# Altium PCB PR406V1.PcbDoc
Units mil, origin at the board's own origin, x right, y up, seen from the top; angles counter-clockwise.
Board outline 4540 x 3630 mil, 2 copper layers (Top Layer, Bottom Layer); 143 components, 108 nets, 406 pads, 189 vias.
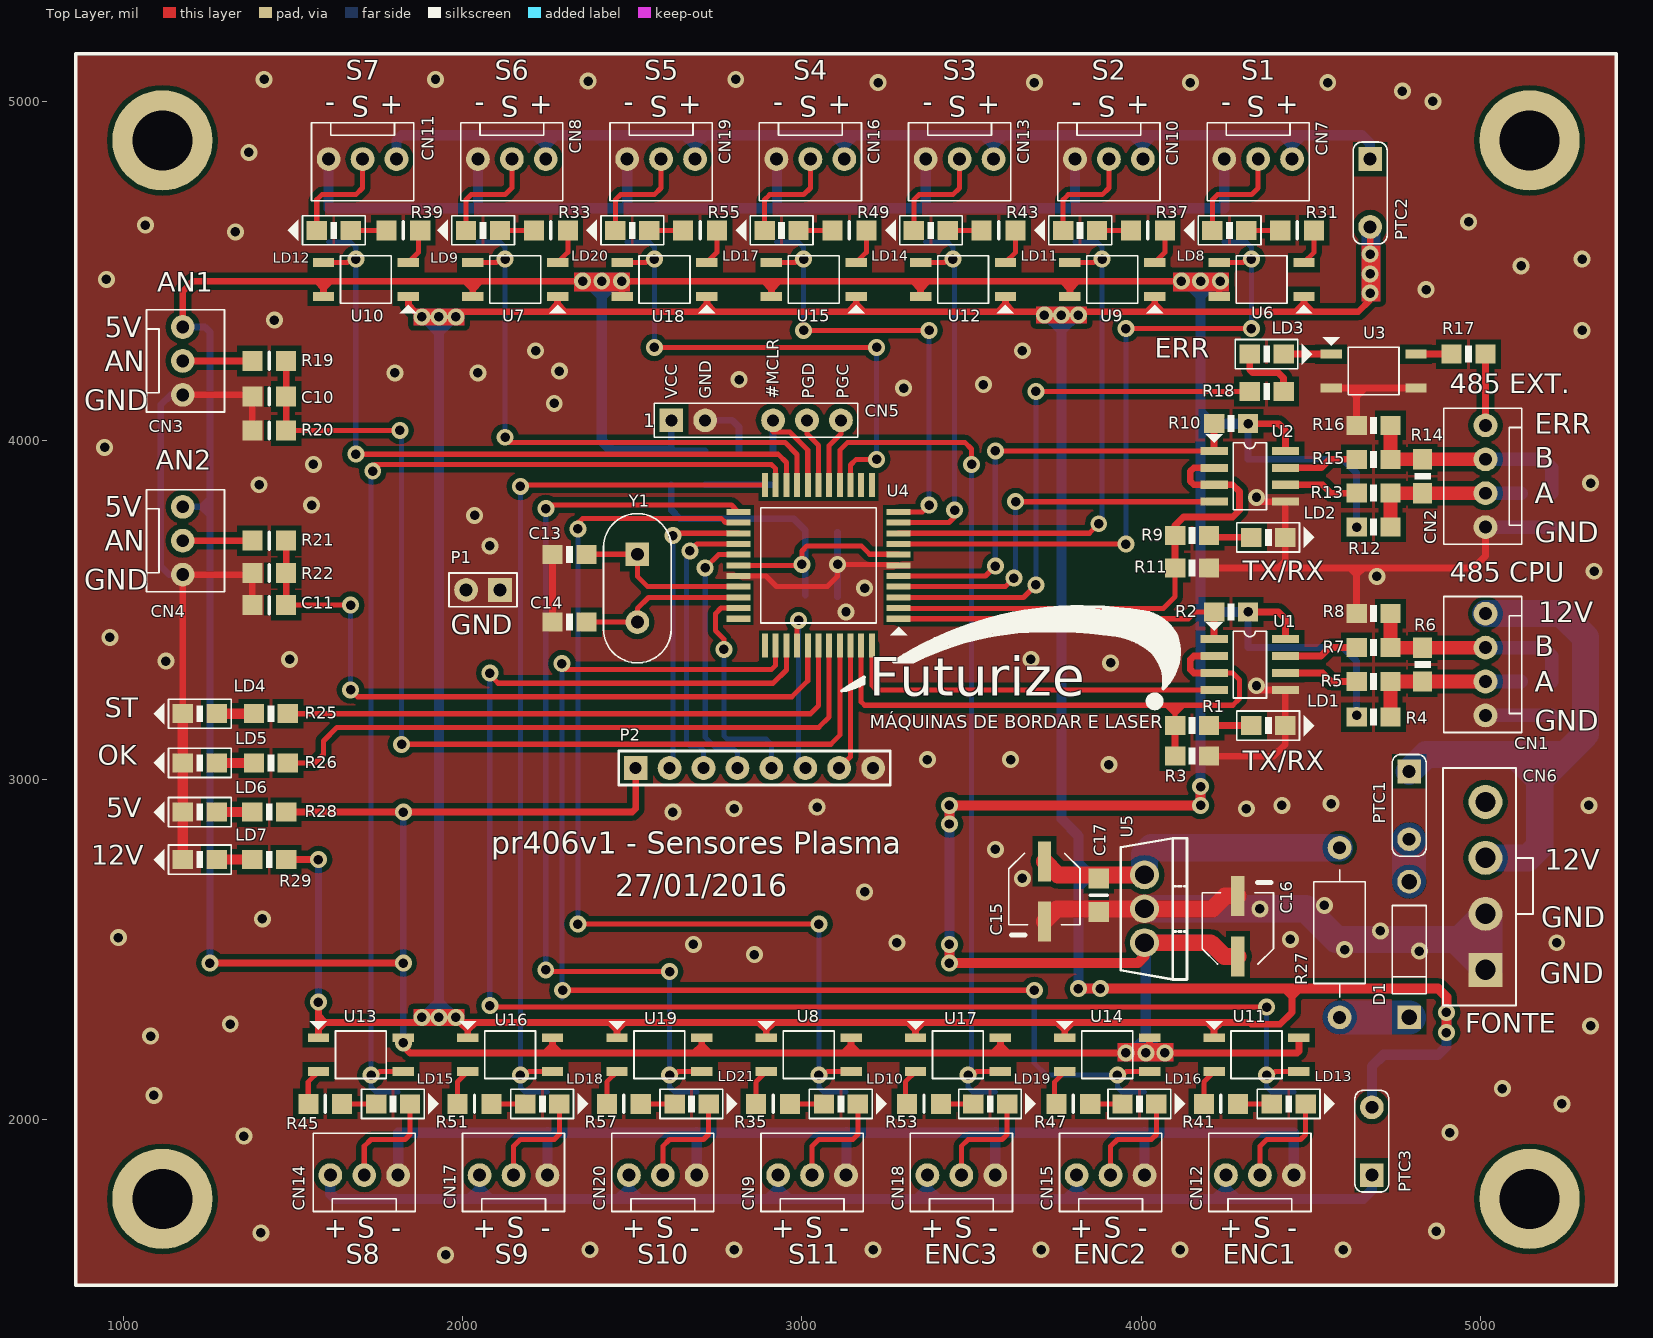
[diagram p0: Top Layer view]
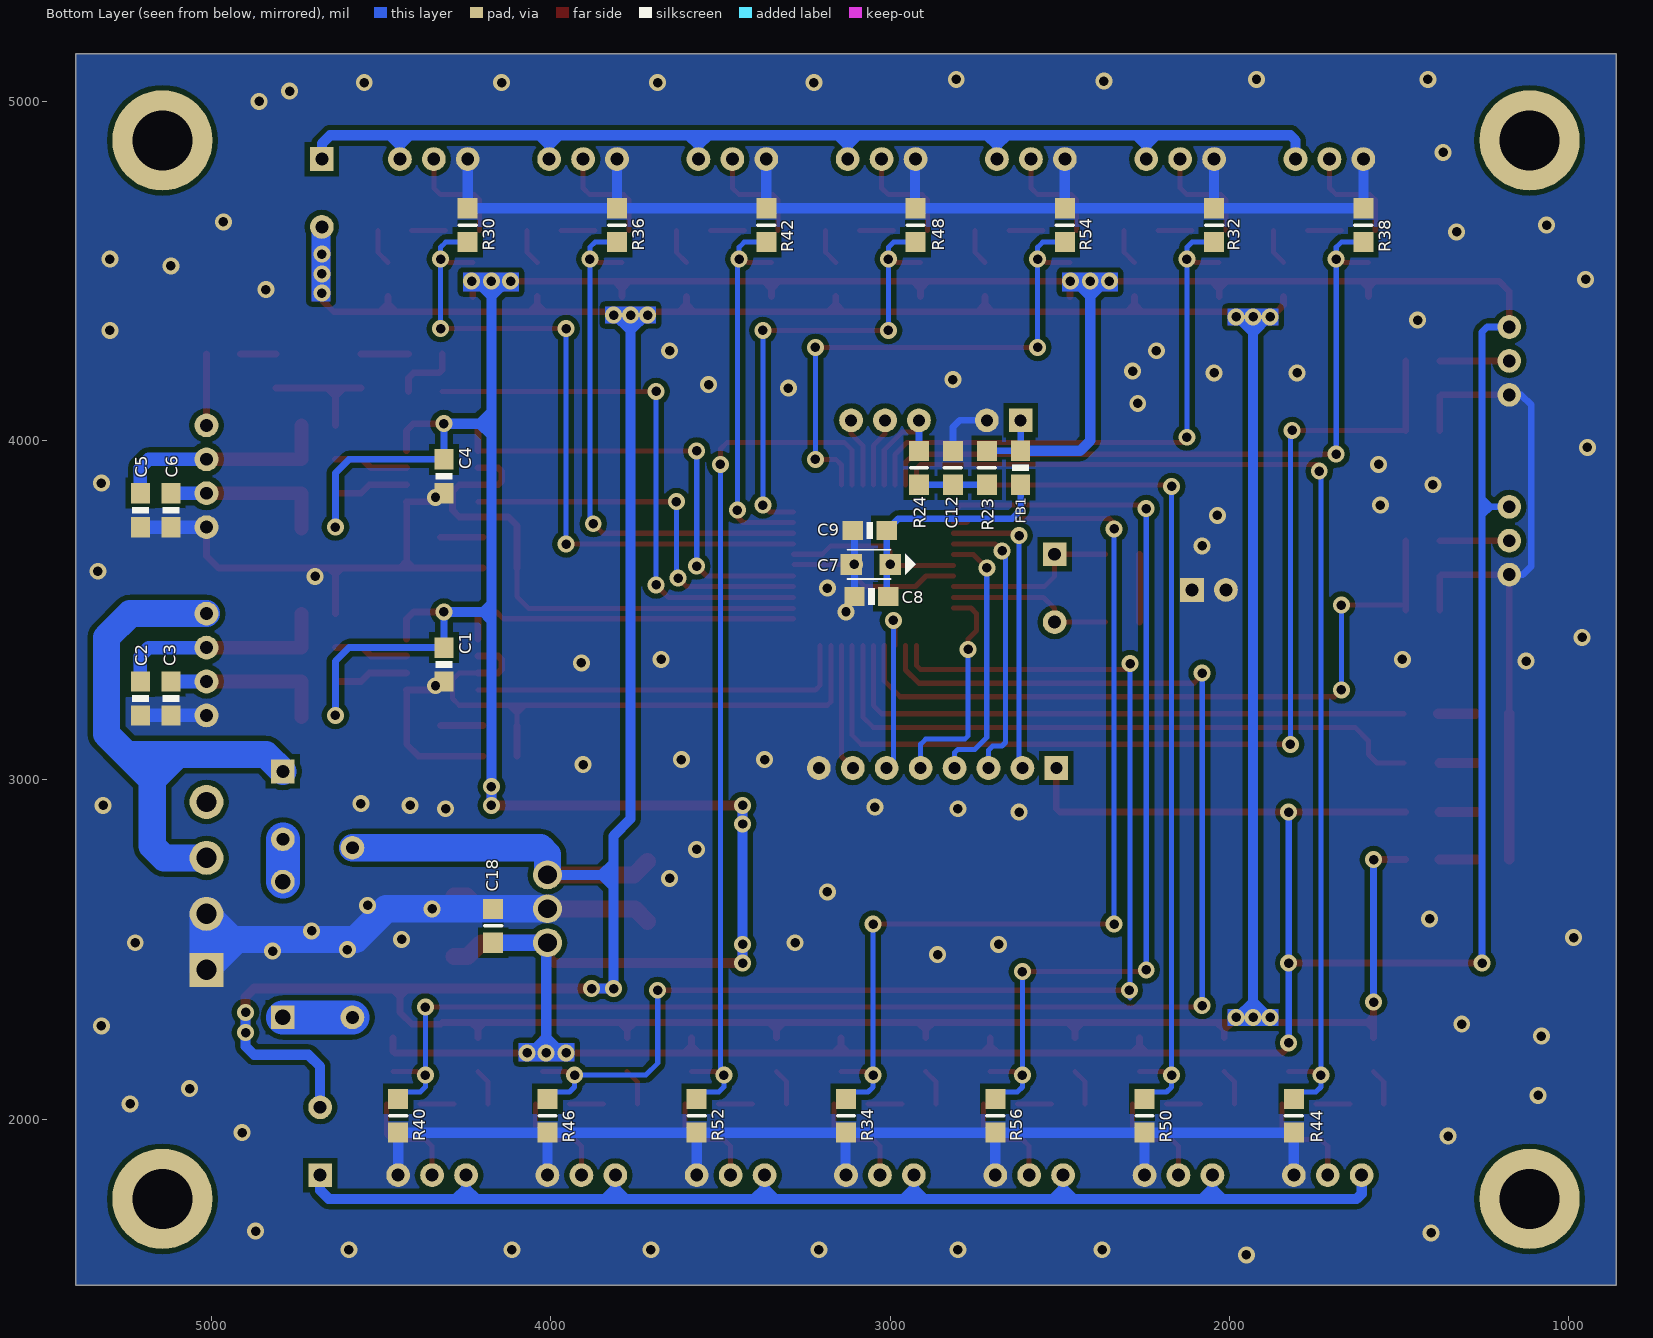
[diagram p1: Bottom Layer view, seen from below]
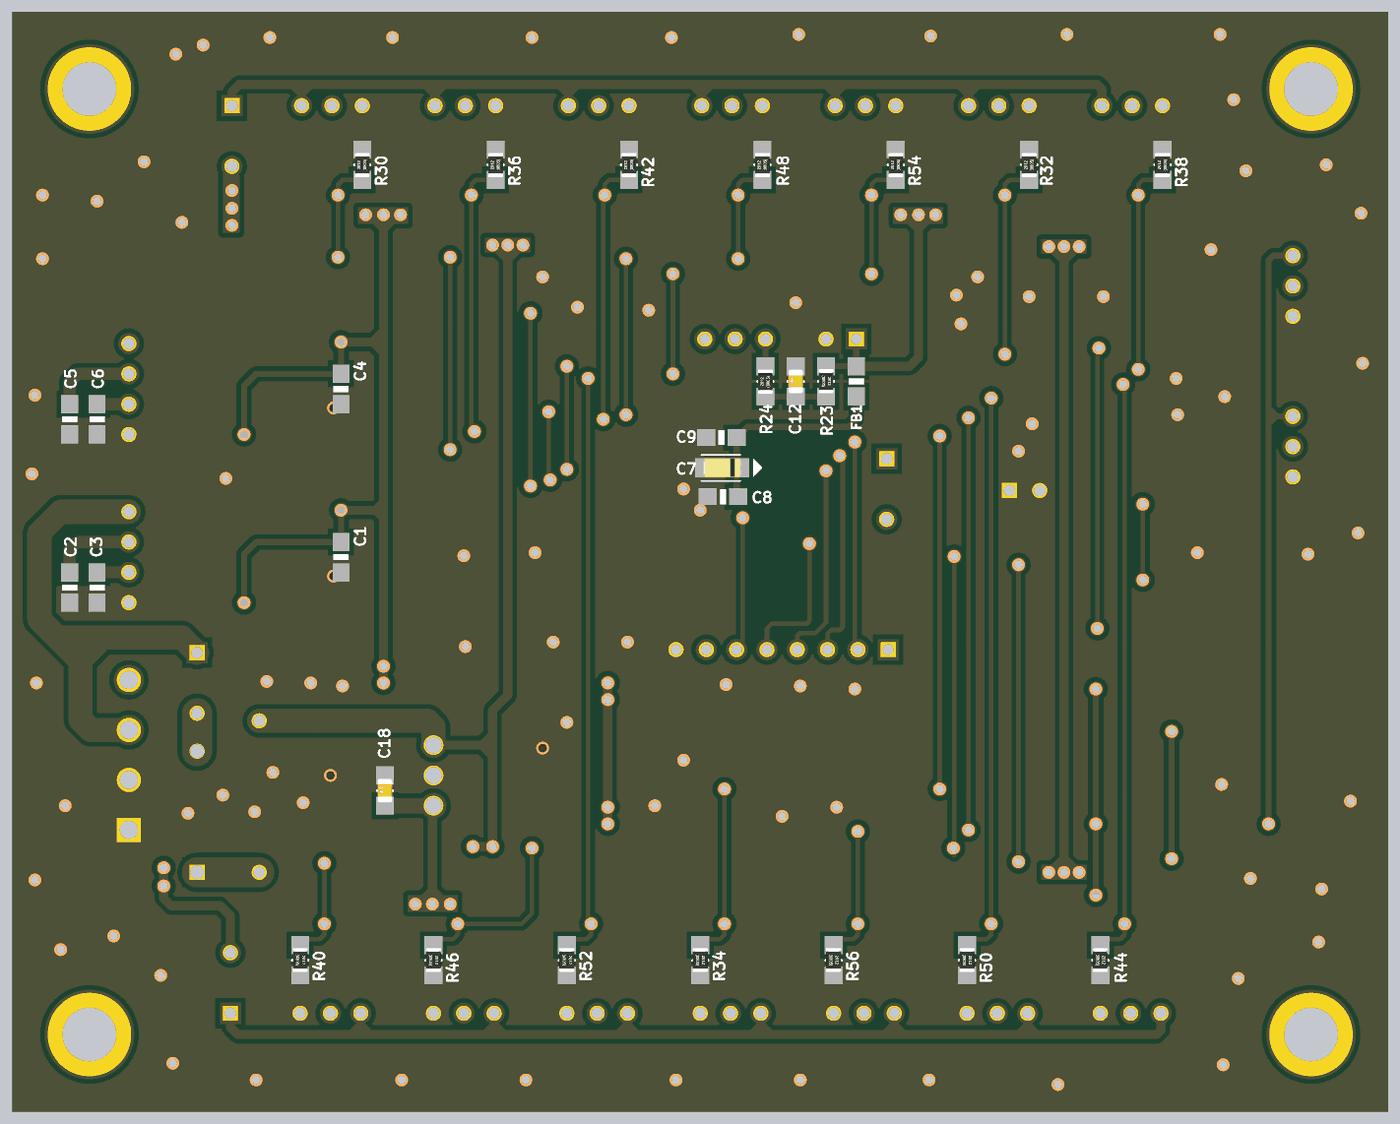
[diagram p2: 3D render of the assembled board from below, using the file's embedded part models]

## Layer stack, top to bottom
Top Solder: solder mask 0.4, Solder Resist, Dk 3.5
Top Layer: signal copper 1.4
Dielectric 1: dielectric 12.6, FR-4, Dk 4.8
Bottom Layer: signal copper 1.4
Bottom Solder: solder mask 0.4, Solder Resist, Dk 3.5

## Board outline
860,1510 860,5140 5400,5140 5400,1510

## Design rules (kind name [scope] priority, off if disabled: settings)
Clearance Clearance_pic [OnLayer('Top Layer') vs InComponent('U4')] p1: gap=10
Clearance [All] p2: gap=15
PlaneClearance [All] p1: clearance=0
PlaneConnect [All] p1: planeconnectstyle=Direct reliefexpansion=20 reliefentries=4 reliefconductorwidth=10 reliefairgap=10
PolygonConnect [All] p1: connectstyle=Direct reliefconductorwidth=10 reliefentries=4 polygonreliefangle="90 Angle" airgapwidth=10
RoutingCorners [All] p1: cornerstyle=45-Degree minsetback=20 maxsetback=20
RoutingLayers RoutingLayers_1 [(InNet('12V') AND InNet('12VIN') AND InNet('12VPTC1') AND InNet('12VPTC2') AND InNet('5V'))] p1: top layer_v5=FALSE bottom layer_v5=TRUE
RoutingLayers [All] p2: top layer_v5=TRUE bottom layer_v5=TRUE
RoutingVias [All] p1: holewidth=28 width=50 viastyle="Through Hole" minholewidth=28 minwidth=50 maxholewidth=28 maxwidth=50
SMDNeckDown [All] p1 off: percent=100.000
SolderMaskExpansion [All] p1: expansion=-10
UnpouredPolygon [All] p1: allowunpoured=FALSE
Width POWER [(InNet('12V') OR InNet('12VIN') OR InNet('12VPTC1') OR InNet('12VPTC2') OR InNet('5V') OR InNet('GND')) AND (OnLayer('Bottom Layer'))] p1 off: maxlimit=100 minlimit=30 preferedwidth=40 checkconnectedcopper=TRUE
Width [All] p2: maxlimit=100 minlimit=10 preferedwidth=15
25 further rules are at their usual default settings.

## Classes and differential pairs
component class Comunicacao: C1 C2 C3 C4 C5 C6 CN1 CN2 LD1 LD2 LD3 R1 R2 R3 R4 R5 R6 R7 R8 R9 R10 R11 R12 R13 R14 R15 R16 R17 R18 U1 U2 U3
component class CPU: C7 C8 C9 C10 C11 C12 C13 C14 C15 C16 C17 C18 CN3 CN4 CN5 CN6 D1 FB1 LD4 LD5 LD6 LD7 P1 P2 PTC1 R19 R20 R21 R22 R23 R24 R25 R26 R28 R29 U4 U5 Y1
component class Sensores: CN7 CN8 CN9 CN10 CN11 CN12 CN13 CN14 CN15 CN16 CN17 CN18 CN19 CN20 LD8 LD9 LD10 LD11 LD12 LD13 LD14 LD15 LD16 LD17 LD18 LD19 LD20 LD21 PTC2 PTC3 R30 R31 R32 R33 R34 R35 R36 R37 R38 R39 R40 R41 R42 R43 R44 R45 R46 R47 R48 R49 R50 R51 R52 R53 R54 R55 R56 R57 U6 U7 U8 U9 U10 U11 U12 U13 U14 U15 U16 U17 U18 U19

## Components (designator, comment, footprint, x,y, rotation, side; value= is the part's Value field where it differs from the comment)
C1 "0.1uF" SMD_0805 4315,3390 r270 bottom
C2 "27pF" SMD_0805 5210,3190 r90 bottom
C3 "27pF" SMD_0805 5120,3190 r90 bottom
C4 "0.1uF" SMD_0805 4315,3945 r270 bottom
C5 "27pF" SMD_0805 5210,3745 r90 bottom
C6 "27pF" SMD_0805 5120,3745 r90 bottom
C7 "10uF x 16V" CapTant_SMD_A 3000,3635 r0 bottom
C8 "0.1uF" SMD_0805 3005,3540 r0 bottom
C9 "0.1uF" SMD_0805 3010,3735 r0 bottom
C10 "100nF" SMD0805C 1430,4130 r180 top
C11 "100nF" SMD0805C 1430,3515 r180 top
C12 "100nF" SMD0805C 2815,3920 r90 bottom
C13 "27pF" SMD_0805 2365,3665 r180 top
C14 "27pF" SMD_0805 2365,3465 r180 top
C15 "10uF x 16V" CapPol_SMD_C 3715,2760 r180 top
C16 "10uF x 16V" CapPol_SMD_C 4285,2480 r0 top
C17 "100nF" SMD0805C 3875,2660 r270 top
C18 "100nF" SMD0805C 4170,2570 r90 bottom
CN1 "KKzinho" "KK4 - 2.54mm" 5015,3190 r270 top
CN2 "KKzinho" "KK4 - 2.54mm" 5015,3745 r270 top
CN3 "KK3" "KK3 - 2.54mm" 1175,4335 r90 top
CN4 "KK3" "KK3 - 2.54mm" 1175,3805 r90 top
CN5 "PROG PIC" "PROG PIC" 2615,4060 r0 top
CN6 "MINIFIT" MFJRH4X1 5015,2440 r270 top
CN7 "KK3" "KK3 - 2.54mm" 4445,4830 r0 top
CN8 "KK3" "KK3 - 2.54mm" 2245,4830 r0 top
CN9 "KK3" "KK3 - 2.54mm" 2930,1835 r180 top
CN10 "KK3" "KK3 - 2.54mm" 4005,4830 r0 top
CN11 "KK3" "KK3 - 2.54mm" 1805,4830 r0 top
CN12 "KK3" "KK3 - 2.54mm" 4250,1835 r180 top
CN13 "KK3" "KK3 - 2.54mm" 3565,4830 r0 top
CN14 "KK3" "KK3 - 2.54mm" 1610,1835 r180 top
CN15 "KK3" "KK3 - 2.54mm" 3810,1835 r180 top
CN16 "KK3" "KK3 - 2.54mm" 3125,4830 r0 top
CN17 "KK3" "KK3 - 2.54mm" 2050,1835 r180 top
CN18 "KK3" "KK3 - 2.54mm" 3370,1835 r180 top
CN19 "KK3" "KK3 - 2.54mm" 2685,4830 r0 top
CN20 "KK3" "KK3 - 2.54mm" 2490,1835 r180 top
D1 "1n4007" DIODE-400 4790,2300 r270 top
FB1 "600" SMD_0805 2615,3870 r90 bottom
LD1 "Vermelho" LED_SMD_0805 4325,3160 r0 top (schematic designator LED1)
LD2 "Vermelho" LED_SMD_0805 4325,3715 r0 top (schematic designator LED2)
LD3 "Vermelho" LED_SMD_0805 4320,4255 r0 top (schematic designator LED3)
LD4 "Vermelho" LED_SMD_0805 1275,3195 r180 top (schematic designator LED4)
LD5 "Vermelho" LED_SMD_0805 1275,3050 r180 top (schematic designator LED5)
LD6 "Verde" LED_SMD_0805 1275,2905 r180 top (schematic designator LED6)
LD7 "Vermelho" LED_SMD_0805 1275,2765 r180 top (schematic designator LED7)
LD8 "Verde" LED_SMD_0805 4310,4620 r180 top (schematic designator LED8)
LD9 "Verde" LED_SMD_0805 2110,4620 r180 top (schematic designator LED9)
LD10 "Verde" LED_SMD_0805 3065,2045 r0 top (schematic designator LED10)
LD11 "Verde" LED_SMD_0805 3870,4620 r180 top (schematic designator LED11)
LD12 "Verde" LED_SMD_0805 1670,4620 r180 top (schematic designator LED12)
LD13 "Verde" LED_SMD_0805 4385,2045 r0 top (schematic designator LED13)
LD14 "Verde" LED_SMD_0805 3430,4620 r180 top (schematic designator LED14)
LD15 "Verde" LED_SMD_0805 1745,2045 r0 top (schematic designator LED15)
LD16 "Verde" LED_SMD_0805 3945,2045 r0 top (schematic designator LED16)
LD17 "Verde" LED_SMD_0805 2990,4620 r180 top (schematic designator LED17)
LD18 "Verde" LED_SMD_0805 2185,2045 r0 top (schematic designator LED18)
LD19 "Verde" LED_SMD_0805 3505,2045 r0 top (schematic designator LED19)
LD20 "Verde" LED_SMD_0805 2550,4620 r180 top (schematic designator LED20)
LD21 "Verde" LED_SMD_0805 2625,2045 r0 top (schematic designator LED21)
P1 "JMP_2" JMP_DIP2 2110,3560 r180 top
P2 "PIN8" PIN8 2510,3035 r0 top
PTC1 "60V/200mA" PTC-200 4790,3025 r270 top
PTC2 "12V/50mA" PTC-200 4675,4830 r270 top
PTC3 "12V/50mA" PTC-200 4680,1835 r90 top
R1 "560" SMD_0805 4100,3160 r0 top
R2 "1k" SMD_0805 4215,3495 r0 top
R3 "1k" SMD_0805 4100,3070 r0 top
R4 "1k" SMD_0805 4735,3185 r180 top
R5 "27" SMD_0805 4635,3290 r0 top
R6 "1k" SMD_0805 4830,3290 r90 top
R7 "27" SMD_0805 4635,3390 r0 top
R8 "1k" SMD_0805 4635,3490 r0 top
R9 "560" SMD_0805 4100,3720 r0 top
R10 "1k" SMD_0805 4215,4050 r0 top
R11 "1k" SMD_0805 4100,3625 r0 top
R12 "1k" SMD_0805 4735,3745 r180 top
R13 "27" SMD_0805 4635,3845 r0 top
R14 "1k" SMD_0805 4830,3845 r90 top
R15 "27" SMD_0805 4635,3945 r0 top
R16 "1k" SMD_0805 4635,4045 r0 top
R17 "100" SMD_0805 5015,4255 r180 top
R18 "150" SMD_0805 4320,4145 r0 top
R19 "1K" SMD0805 1430,4235 r180 top
R20 "1K" SMD0805 1430,4030 r0 top
R21 "1K" SMD0805 1430,3705 r180 top
R22 "1K" SMD0805 1430,3610 r0 top
R23 "22k" SMD0805 2715,3920 r270 bottom
R24 "1K" SMD0805 2915,3920 r90 bottom
R25 "1k" SMD_0805 1485,3195 r180 top
R26 "1k" SMD_0805 1485,3050 r180 top
R27 "1R" AXIAL-500 4585,2300 r90 top
R28 "1k" SMD_0805 1480,2905 r180 top
R29 "2k2" SMD_0805 1480,2765 r180 top
R30 "1k" SMD0805 4245,4635 r90 bottom
R31 "1k" SMD0805 4460,4620 r0 top
R32 "1k" SMD0805 2045,4635 r90 bottom
R33 "1k" SMD0805 2260,4620 r0 top
R34 "1k" SMD0805 3130,2010 r270 bottom
R35 "1k" SMD0805 2915,2045 r180 top
R36 "1k" SMD0805 3805,4635 r90 bottom
R37 "1k" SMD0805 4020,4620 r0 top
R38 "1k" SMD0805 1605,4635 r90 bottom
R39 "1k" SMD0805 1825,4620 r0 top
R40 "1k" SMD0805 4450,2010 r270 bottom
R41 "1k" SMD0805 4235,2045 r180 top
R42 "1k" SMD0805 3365,4635 r90 bottom
R43 "1k" SMD0805 3580,4620 r0 top
R44 "1k" SMD0805 1810,2010 r270 bottom
R45 "1k" SMD0805 1595,2045 r180 top
R46 "1k" SMD0805 4010,2010 r270 bottom
R47 "1k" SMD0805 3800,2045 r180 top
R48 "1k" SMD0805 2925,4635 r90 bottom
R49 "1k" SMD0805 3140,4620 r0 top
R50 "1k" SMD0805 2250,2010 r270 bottom
R51 "1k" SMD0805 2035,2045 r180 top
R52 "1k" SMD0805 3570,2010 r270 bottom
R53 "1k" SMD0805 3360,2045 r180 top
R54 "1k" SMD0805 2485,4635 r90 bottom
R55 "1k" SMD0805 2700,4620 r0 top
R56 "1k" SMD0805 2690,2010 r270 bottom
R57 "1k" SMD0805 2475,2045 r180 top
U1 "ADM485" SO-8_SO-G8/E2.5 4215,3415 r270 top
U2 "ADM485" SO-8_SO-G8/E2.5 4215,3970 r270 top
U3 "HMA121" SO4 4560,4255 r270 top
U4 "PIC18F45K22" QFP10X10-G44/Y1.8N 3285,3475 r180 top
U5 "7805" TO220_V 4010,2720 r270 top
U6 "HMA121" SO4 4480,4425 r90 top
U7 "HMA121" SO4 2280,4425 r90 top
U8 "HMA121" SO4 2895,2240 r270 top
U9 "HMA121" SO4 4040,4425 r90 top
U10 "HMA121" SO4 1840,4425 r90 top
U11 "HMA121" SO4 4215,2240 r270 top
U12 "HMA121" SO4 3600,4425 r90 top
U13 "HMA121" SO4 1575,2240 r270 top
U14 "HMA121" SO4 3775,2240 r270 top
U15 "HMA121" SO4 3160,4425 r90 top
U16 "HMA121" SO4 2015,2240 r270 top
U17 "HMA121" SO4 3335,2240 r270 top
U18 "HMA121" SO4 2720,4425 r90 top
U19 "HMA121" SO4 2455,2240 r270 top
Y1 "15MHz" CRYSTAL 2515,3665 r270 top

## Footprints (in the part's own frame and the unit in brackets; to place one, negate y for a bottom-side part, rotate by r counter-clockwise, add the part's x,y. Pads: shape width x height; smd on the part's side, far side on the other; paste and mask are expansions set on the pad)
AXIAL-500 [mil]
  round 70 hole 38: 1(0,0) 2(500,0)
  silkscreen extent 60,-76 435,76, body extent -16,-79 516,79, height 157
CapPol_SMD_C [mm]
  rect 1x3 smd: 1(0,0) 2(0,4.5)
  silkscreen extent -2.67,-0.6 2.67,5.51, body extent -2.62,-0.92 2.68,4.98, height 5.41
CapTant_SMD_A [mm]
  rect 1.6x1.6 smd: 1(0,0) 2(2.921,0)
  silkscreen extent -1.91,-1.09 3.2,1.09, body extent -0.15,-0.8 3.04,0.8, height 1.61
CRYSTAL [mil]
  rect 70x70 hole 38: 1(0,0)
  round 70 hole 38: 2(200,0)
  silkscreen extent -120,-100 320,100, body extent -110,-86 310,86, height 512
DIODE-400 [mil]
  rect 70x70 hole 45: 1(0,0)
  round 70 hole 45: 2(-400,0)
  silkscreen extent -330,-50 -70,50, body extent -416,-51 16,51, height 106
JMP_DIP2 [mil]
  rect 70x70 hole 38: 1(0,0)
  round 70 hole 38: 2(100,0)
  silkscreen extent -50,-50 150,50, body extent -50,-50 150,50, height 343
"KK3 - 2.54mm" [mil]
  round 70 hole 38: 1(0,0) 2(-100,0) 3(-200,0)
  silkscreen extent -250,-123 51,107, body extent -250,-123 51,107, height 433
"KK4 - 2.54mm" [mil]
  round 70 hole 38: 1(0,0) 2(-100,0) 3(-200,0) 4(-300,0)
  silkscreen extent -350,-123 51,107, body extent -350,-123 51,107, height 433
LED_SMD_0805 [mil]
  rect 60x56 smd: 1(0,0) 2(100,0)
  silkscreen extent -43,-43 185,43, body extent -11,-31 115,32, height 44
MFJRH4X1 [mil] "Minifit junior 4 pads em uma fileira"
  rect 100x100 hole 60: 1(0,0)
  round 100 hole 60: 2(-165,0) 3(-330,0) 4(-495,0)
  silkscreen extent -595,-125 105,140, body extent -600,-125 105,140, height 492
PIN8 [mil]
  rect 70x70 hole 35.43: 1(0,0)
  round 70 hole 35.43: 2(100,0) 3(200,0) 4(300,0) 5(400,0) 6(500,0) 7(600,0) 8(700,0)
  silkscreen extent -50,-50 750,50, body extent -50,-51 750,50, height 343
"PROG PIC" [mil]
  rect 70x70 hole 35.43: 1(0,0)
  round 70 hole 35.43: 2(100,0) 3(300,0) 4(400,0) 5(500,0)
  silkscreen extent -50,-50 550,50, body extent -50,-50 550,50, height 343
PTC-200 [mil]
  rect 70x70 hole 38: 1(0,0)
  round 70 hole 38: 2(200,0)
  silkscreen extent -50,-50 250,50, body extent -57,-16 257,16, height 314
QFP10X10-G44/Y1.8N [mm]
  rect 1.8x0.45 smd: 1(0,0) 2(0,-0.8) 3(0,-1.6) 4(0,-2.4) 5(0,-3.2) 6(0,-4) 7(0,-4.8) 8(0,-5.6) 9(0,-6.4) 10(0,-7.2) 11(0,-8) 23(12,-8) 24(12,-7.2) 25(12,-6.4) 26(12,-5.6) 27(12,-4.8) 28(12,-4) 29(12,-3.2) 30(12,-2.4) 31(12,-1.6) 32(12,-0.8) 33(12,0)
  rect 0.45x1.8 smd: 12(2,-10) 13(2.8,-10) 14(3.6,-10) 15(4.4,-10) 16(5.2,-10) 17(6,-10) 18(6.8,-10) 19(7.6,-10) 20(8.4,-10) 21(9.2,-10) 22(10,-10) 34(10,2) 35(9.2,2) 36(8.4,2) 37(7.6,2) 38(6.8,2) 39(6,2) 40(5.2,2) 41(4.4,2) 42(3.6,2) 43(2.8,2) 44(2,2)
  silkscreen extent -0.63,-8.32 10.32,1.25, body extent -0.11,-10.11 12.11,2.11, height 1.02
SMD0805 [mm] "Generic 2 Pins Surface Mount Device"
  rect 1.5x1.5 smd: 1(-1.27,0) 2(1.27,0)
  Top Layer pour cut-out: -0.381,0.762 0.381,0.762 0.381,-0.762 -0.381,-0.762
  silkscreen extent 0,-0.64 0,0.64, body extent -1.02,-0.62 0.98,0.62, height 0.45
SMD0805C [mm] "Generic 2 Pins Surface Mount Device"
  rect 1.5x1.5 smd: 1(-1.27,0) 2(1.27,0)
  Top Layer pour cut-out: -0.381,0.762 0.381,0.762 0.381,-0.762 -0.381,-0.762
  silkscreen extent 0,-0.64 0,0.64, body extent -1,-0.62 1,0.62, height 0.8
SMD_0805 [mil]
  rect 60x56 smd: 1(0,0) 2(100,0)
  silkscreen extent 40,-25 60,25, body extent -10,-25 110,25, height 20
SO4 [mil]
  rect 26x62.99 smd: 1(0,0) 2(100,0) 3(100,250) 4(0,250)
  silkscreen extent -49,-25 120,200, body extent -20,-5 120,255, height 79
SO-8_SO-G8/E2.5 [mm]
  rect 0.6x2.05 smd: 1(0,0) 2(1.27,0) 3(2.54,0) 4(3.81,0) 5(3.81,5.35) 6(2.54,5.35) 7(1.27,5.35) 8(0,5.35)
  silkscreen extent -1.25,-0.63 4.4,3.93, body extent -0.55,-0.32 4.35,5.67, height 1.75
TO220_V [mil]
  round 85 hole 55: 1(0,0) 2(100,0) 3(200,0)
  silkscreen extent -108,-70 308,125, body extent -65,-60 270,110, height 787

## Part data
C1 C2 C3 C4 C5 C6 C8 C9 C13 C14: library part Cap, "Capacitor"
C7 C15 C16: library part CapPol, "Polarized Capacitor"
C10 C11 C12 C17 C18: library part CAP, "Capacitor"
CN1 CN2: library part KK4, "Conector Linear tipo KK de 4 vias"
CN3 CN4 CN7 CN8 CN9 CN10 CN11 CN12 CN13 CN14 CN15 CN16 CN17 CN18 CN19 CN20: "Conector Linear tipo KK de 3 vias"
CN5: "Conector para gravação do PIC"
CN6: library part MINIFIT4, "Conector minifit de 4 vias"
D1: library part Diodo, "Diodos de diversos tamanhos"
FB1: library part FerriteBead, "Ferrite Bead Inductor"
LD1 LD2 LD3 LD4 LD5 LD6 LD7 LD8 LD9 LD10 LD11 LD12 LD13 LD14 LD15 LD16 LD17 LD18 LD19 LD20 LD21: library part Led, "Led"
P1: "Jumper 2 terminais"
P2: "Conector Linear"
PTC1 PTC2 PTC3: library part PTC, "Termistor"
R1 R2 R3 R4 R5 R6 R7 R8 R9 R10 R11 R12 R13 R14 R15 R16 R17 R18 R25 R26 R27 R28 R29: library part Res, "Resistor"
R19 R20 R21 R22 R23 R24 R30 R31 R32 R33 R34 R35 R36 R37 R38 R39 R40 R41 R42 R43 R44 R45 R46 R47 R48 R49 R50 R51 R52 R53 R54 R55 R56 R57: library part Resistor, "Resistor"
U1 U2: library part RS485, "Differential bus transceiver (MAX485 - SN75176)"
U3 U6 U7 U8 U9 U10 U11 U12 U13 U14 U15 U16 U17 U18 U19: library part HMA, "Phototransistor Optocoupler SMD full Pptch mini-flat type"
U4: library part PIC18F45K22_SMD, "Microcontrollers with nanoWatt XLP Technology"
U5: library part 78xx, "Series 3-Terminal Positive Regulator"
Y1: library part Cristal, "Crystal Oscillator"

## Free pads (board coordinates)
  round 295.28 hole 177.17: 0(1115,1765) 0(1115,4885) 0(5145,1765) 0(5145,4885)

## Via types
v1: diameter 50, hole 28, Top Layer to Bottom Layer, 189 vias

## Nets (pads, with @x,y where several pads share a name; then routed paths per layer and width w, separated by ;. In a path a pad name is that pad's centre, name@x,y a point inside that pad or via, vN(x,y) a via of type N, cw(c..) or ccw(c..) an arc to the next point about the centre after c; other vN are vias at no path point)
5V: C1.1 C4.1 C16.1 C18.1 CN3.1 CN4.1 CN5.1 FB1.2 P2.1 R2.2 R4.2 R10.2 R12.2 R23.1 R28.1 U1.8 U2.8 U5.3 U6.4 U7.4 U8.4 U9.4 U10.4 U11.4 U12.4 U13.4 U14.4 U15.4 U16.4 U17.4 U18.4 U19.4 | length 18896.3
  Top Layer w20: CN3.1 1175,4440 1205,4470 1570,4470 ; v1(1255,2460) v1(1825,2460) ; R28.1 v1(1825,2905) 2500,2905 2510,2915 P2.1 ; U10.4 1590,4450 ; U13.4 1825,2215 1845,2195 2242.5,2195 ; U7.4 2030,4447.5 ; U16.4 2265,2217.5 ; v1@2447.5,4470 v1@2470,4447.5 ; U18.4 v1@2470,4447.5 ; U19.4 2705,2217.5 ; U15.4 2910,4447.5 ; U8.4 3145,2217.5 ; U12.4 3350,4447.5 ; U17.4 3585,2217.5 ; U9.4 3790,4447.5 ; U14.4 4025,2217.5 ; v1@4225,4470 4230,4465 U6.4 ; v1(4233.75,4470) 3812.5,4470 ; v1(4315,3495) 4405,3495 4425.63,3474.37 U1.8 ; v1(4315,4050) 4405,4050 4425.63,4029.37 U2.8 ; U11.4 4465,2200 4460,2195 v1@4047.5,2195 ; 1570,4470 1590,4450 ; 1570,4470 1610,4470 ; 1590,4450 1610,4470 ; 1610,4470 2007.5,4470 ; 2007.5,4470 2030,4447.5 ; 2007.5,4470 2052.5,4470 ; 2030,4447.5 2052.5,4470 ; 2052.5,4470 v1@2492.5,4470 ; 2242.5,2195 2265,2217.5 ; 2242.5,2195 2287.5,2195 ; 2265,2217.5 2287.5,2195 ; 2287.5,2195 2682.5,2195 ; v1@2470,4447.5 v1@2492.5,4470 ; v1@2492.5,4470 2887.5,4470 ; 2682.5,2195 2705,2217.5 ; 2682.5,2195 2727.5,2195 ; 2705,2217.5 2727.5,2195 ; 2727.5,2195 3122.5,2195 ; 2887.5,4470 2910,4447.5 ; 2887.5,4470 2932.5,4470 ; 2910,4447.5 2932.5,4470 ; 2932.5,4470 3327.5,4470 ; 3122.5,2195 3145,2217.5 ; 3122.5,2195 3167.5,2195 ; 3145,2217.5 3167.5,2195 ; 3167.5,2195 3562.5,2195 ; 3327.5,4470 3350,4447.5 ; 3327.5,4470 3372.5,4470 ; 3350,4447.5 3372.5,4470 ; 3372.5,4470 3767.5,4470 ; 3562.5,2195 3585,2217.5 ; 3562.5,2195 3607.5,2195 ; 3585,2217.5 3607.5,2195 ; 3607.5,2195 v1(3955,2195) v1@4002.5,2195 ; 3767.5,4470 3790,4470 ; 3767.5,4470 3790,4447.5 ; 3790,4447.5 3812.5,4470 ; 3790,4447.5 3790,4470 ; 3790,4470 3812.5,4470 ; v1@4002.5,2195 4025,2217.5 ; v1@4002.5,2195 v1@4025,2195 ; v1@4025,2195 v1@4047.5,2195 ; v1@4025,2195 4025,2217.5 ; 4025,2217.5 v1@4047.5,2195
  Top Layer w30: v1(3435,2515) v1(3435,2460) 3990,2460 4010,2480 U5.3 ; v1(3435,2870) v1(3435,2925) v1(4175,2925) v1(4175,2980)
  Top Layer w50: U5.3 4205,2520 4245,2480 C16.1
  Bottom Layer w20: CN4.1 1230,3805 ; CN3.1 1240,4335 1255,4320 1255,3830 ; v1(1255,2460) 1255,3780 ; v1(1825,2225) v1(1825,2460) v1(1825,2905) ; CN5.1 FB1.2 R23.1 ; v1(4315,3495) C1.1 4595,3390 4635,3350 v1(4635,3190) ; v1(4315,4050) C4.1 4595,3945 4635,3905 v1(4635,3745) ; 1230,3805 1255,3805 ; 1230,3805 1255,3780 ; 1230,3805 1255,3830 ; 1255,3780 1255,3805 ; 1255,3805 1255,3830
  Bottom Layer w30: v1@2365,4470 2410,4425 ; v1(2410,4470) 2410,4425 ; 2435,4450 2410,4425 ; FB1.2 2440,3970 2410,4000 2410,4425 ; v1(3435,2460) v1(3435,2515) v1(3435,2870) v1(3435,2925) ; 3988.75,2215 4013.75,2240 ; U5.3 4013.75,2516.25 4013.75,2240 ; v1(4013.75,2195) 4013.75,2240 ; v1@4058.75,2195 4013.75,2240 ; v1@4130,4470 4175,4425 ; v1(4175,2925) v1(4175,2980) 4175,3520 ; v1(4175,4470) 4175,4425 ; 4180,3475 4200,3495 ; 4200,4450 4175,4425 ; v1(4315,3495) 4200,3495 ; v1(4315,4050) 4210,4050 ; 4175,3520 4200,3495 ; 4175,3520 4175,4015 ; 4175,4015 4210,4050 ; 4175,4015 4175,4050 ; 4175,4050 4210,4050 ; 4175,4050 4175,4085 ; 4175,4085 4175,4425 ; 4175,4085 4210,4050
  Bottom Layer w50: U5.3 C18.1
  other v1: 4070,2195 2353.75,4470 2468.75,4470 4118.75,4470
5V_CPU: C7.1 C8.1 C9.1 FB1.1 U4.7 U4.28 | length 1222
  Top Layer w15: U4.28 v1@2997.48,3632.48 ; v1(3000,3635) 3000,3675 3015,3690 3175,3690 3200,3665 U4.7@3285,3665
  Top Layer w20: v1@2997.48,3632.48 v1(3000,3635)
  Bottom Layer w20: FB1.1 2615,3795 2640,3770 2975,3770 C9.1 C8.1@3010,3545 ; C7.1@2995,3640 v1(3000,3635)
12V: C15.1 C17.1 PTC2.2 PTC3.2 R27.2 R29.1 U5.1 U6.1 U7.1 U8.1 U9.1 U10.1 U11.1 U12.1 U13.1 U14.1 U15.1 U16.1 U17.1 U18.1 U19.1 | length 15565.9
  Top Layer w20: R29.1 v1(1575,2765) ; U13.1 1575,2265 ; v1(1575,2345) 1575,2305 ; U10.1 1840,4400 1860,4380 2257.5,4380 ; U16.1 2015,2262.5 ; U7.1 2280,4402.5 ; U19.1 2455,2262.5 ; U18.1 2720,4402.5 ; U8.1 2895,2262.5 ; U15.1 3160,4402.5 ; U17.1 3335,2262.5 ; U12.1 3600,4402.5 ; U14.1 3775,2262.5 ; U9.1 4040,4402.5 ; 4195,2285 4215,2265 4235,2285 ; U11.1 4215,2280 ; 4420,2385 4445,2360 ; 4445,2385 4445,2360 ; 4457.5,4382.5 4480,4405 4502.5,4382.5 ; 4470,2385 4445,2360 ; U6.1 4480,4385 4475,4380 ; PTC2.2 v1(4675,4550) v1@4675,4541.25 ; v1@4680,4546.25 v1@4675,4541.25 ; 1575,2265 1595,2285 ; 1575,2265 1575,2285 ; 1575,2285 1595,2285 ; 1575,2285 1575,2305 ; 1575,2305 1595,2285 ; 1595,2285 v1@1992.5,2285 ; v1@1992.5,2285 2015,2262.5 ; v1@1992.5,2285 2037.5,2285 ; 2015,2262.5 2037.5,2285 ; 2037.5,2285 2432.5,2285 ; 2257.5,4380 2280,4402.5 ; 2257.5,4380 2302.5,4380 ; 2280,4402.5 2302.5,4380 ; 2302.5,4380 2697.5,4380 ; 2432.5,2285 2455,2262.5 ; 2432.5,2285 2477.5,2285 ; 2455,2262.5 2477.5,2285 ; 2477.5,2285 2872.5,2285 ; 2697.5,4380 2720,4402.5 ; 2697.5,4380 2742.5,4380 ; 2720,4402.5 2742.5,4380 ; 2742.5,4380 3137.5,4380 ; 2872.5,2285 2895,2262.5 ; 2872.5,2285 2917.5,2285 ; 2895,2262.5 2917.5,2285 ; 2917.5,2285 3312.5,2285 ; 3137.5,4380 3160,4402.5 ; 3137.5,4380 3182.5,4380 ; 3160,4402.5 3182.5,4380 ; 3182.5,4380 3577.5,4380 ; 3312.5,2285 3335,2262.5 ; 3312.5,2285 3357.5,2285 ; 3335,2262.5 3357.5,2285 ; 3357.5,2285 3752.5,2285 ; 3577.5,4380 3600,4402.5 ; 3577.5,4380 3622.5,4380 ; 3600,4402.5 3622.5,4380 ; 3622.5,4380 4017.5,4380 ; 3752.5,2285 3775,2285 ; 3752.5,2285 3775,2262.5 ; 3775,2262.5 3797.5,2285 ; 3775,2262.5 3775,2285 ; 3775,2285 3797.5,2285 ; 3797.5,2285 4235,2285 ; 4017.5,4380 4040,4380 ; 4017.5,4380 4040,4402.5 ; 4040,4380 4062.5,4380 ; 4040,4380 4040,4402.5 ; 4040,4402.5 4062.5,4380 ; 4062.5,4380 4475,4380 ; 4235,2285 4320,2285 4325,2280 4410,2280 4445,2315 4445,2360 ; 4475,4380 4640,4380 4675,4415 v1(4675,4435) v1@4675,4480 ; v1@4675,4480 v1(4675,4491.25) v1@4675,4502.5 ; v1@4675,4480 v1@4675,4502.5 ; v1@4675,4502.5 v1@4675,4541.25
  Top Layer w30: v1@3825,2385 v1(3880,2385) 4420,2385 4445,2385 4875,2385 4900,2360 v1(4900,2255)
  Top Layer w50: C15.1 3755,2720 U5.1
  Bottom Layer w20: v1(1575,2345) v1(1575,2765) ; 4695,4575 4695,4610 PTC2.2 PTC2.2@4675,4615 ; PTC2.2@4675,4615 v1(4675,4550) 4660,4565 4660,4600 PTC2.2@4675,4615
  Bottom Layer w30: v1@1885,2300 1930,2345 ; v1@1885,4365 1930,4320 ; v1(1930,2300) 1930,2345 ; v1(1930,4365) 1930,4320 ; v1@1975,2300 1930,2345 ; v1@1975,4365 1930,4320 ; v1@3720,4370 3765,4325 ; v1(3765,4370) 3765,4325 ; v1@3810,4370 3765,4325 ; 3820,2720 3850,2720 ; v1(3880,2385) 3830,2385 3815,2400 3815,2685 ; U5.1 3850,2720 ; PTC3.2 4680,2155 4715,2190 4875,2190 4900,2215 v1(4900,2315) ; 1930,2345 1930,4320 ; 3765,4325 3765,2885 3815,2835 3815,2755 ; 3815,2685 3850,2720 ; 3815,2685 3815,2755 ; 3815,2755 3850,2720
  Bottom Layer w80: U5.1@4010,2727.5 4010,2780 4030,2800 R27.2
  other v1: 1880,2300 1980,2300 3815,2385 1880,4365 1980,4365 3715,4370 3815,4370
12VIN: CN1.4 CN6.3 PTC1.1 | length 1831.2
  Bottom Layer w80: PTC1.1 4840,3075 5100,3075 ; CN6.3 5140,2770 5175,2805 5175,3000 ; CN1.4 5240,3490 5310,3420 5310,3135 5250,3075 ; 5100,3075 5175,3000 ; 5100,3075 5175,3075 ; 5175,3000 5250,3075 ; 5175,3000 5175,3075 ; 5175,3075 5250,3075
12VPTC1: CN7.1 CN8.1 CN10.1 CN11.1 CN13.1 CN16.1 CN19.1 PTC2.1 | length 3765.7
  Bottom Layer w30: CN11.1 1805,4885 1820,4900 2215,4900 ; CN8.1 2245,4870 ; CN19.1 2685,4870 ; CN16.1 3125,4870 ; CN13.1 3565,4870 ; CN10.1 4005,4870 ; CN7.1 4445,4870 ; PTC2.1 4675,4875 4650,4900 4475,4900 ; 2215,4900 2245,4900 ; 2215,4900 2245,4870 ; 2245,4870 2275,4900 ; 2245,4870 2245,4900 ; 2245,4900 2275,4900 ; 2275,4900 2655,4900 ; 2655,4900 2685,4870 ; 2655,4900 2715,4900 ; 2685,4870 2715,4900 ; 2715,4900 3095,4900 ; 3095,4900 3125,4870 ; 3095,4900 3155,4900 ; 3125,4870 3155,4900 ; 3155,4900 3535,4900 ; 3535,4900 3565,4870 ; 3535,4900 3595,4900 ; 3565,4870 3595,4900 ; 3595,4900 3975,4900 ; 3975,4900 4005,4870 ; 3975,4900 4035,4900 ; 4005,4870 4035,4900 ; 4035,4900 4415,4900 ; 4415,4900 4445,4870 ; 4415,4900 4475,4900 ; 4445,4870 4475,4900
12VPTC2: CN9.1 CN12.1 CN14.1 CN15.1 CN17.1 CN18.1 CN20.1 PTC3.1 | length 3965.7
  Bottom Layer w30: CN14.1 1610,1780 1625,1765 2020,1765 ; CN17.1 2050,1795 ; 2460,1765 2490,1795 ; CN20.1 2490,1795 ; 2520,1765 2490,1795 ; 2900,1765 2930,1795 ; CN9.1 2930,1795 ; 2960,1765 2930,1795 ; 3340,1765 3370,1795 ; CN18.1 3370,1795 ; 3400,1765 3370,1795 ; 3780,1765 3810,1795 ; CN15.1 3810,1795 ; 3840,1765 3810,1795 ; 4220,1765 4250,1795 ; CN12.1 4250,1795 ; 4280,1765 4250,1795 ; PTC3.1 4680,1790 4655,1765 2080,1765 ; 2020,1765 2050,1795 ; 2020,1765 2050,1765 ; 2050,1765 2050,1795 ; 2050,1765 2080,1765 ; 2050,1795 2080,1765
#MCLR: CN5.3 R24.2 U4.18 | length 353
  Top Layer w15: CN5.3 2915,4025 2965,4025 3017.28,3972.72 U4.18
  Bottom Layer w20: R24.2 CN5.3
AN1: C10.1 R19.1 R20.2 U4.41 | length 3034.4
  Top Layer w15: R20.2 v1(1815,4030) ; v1(1820,3105) 3085,3105 3111.77,3131.77 U4.41
  Top Layer w20: R20.2 C10.1 R19.1
  Bottom Layer w15: v1(1815,4030) 1820,4025 v1(1820,3105)
AN2: C11.1 R21.1 R22.2 U4.38 | length 2119.1
  Top Layer w15: C11.1@1485,3515 v1(1670,3515) ; v1(1670,3265) 1690,3245 2970,3245 3017.28,3292.28 U4.38
  Top Layer w20: C11.1@1480,3500 C11.1 R22.2 R21.1
  Bottom Layer w15: v1(1670,3265) v1(1670,3515)
ENCODER1: R40.1 U4.36 U11.3 | length 4658.2
  Top Layer w15: v1(2080,2335) 2080,2330 v1(4370,2330) ; v1(2080,3315) 2080,3310 2105,3285 2915,3285 2954.29,3324.29 U4.36 ; v1@4385,2130 4395,2140 U11.3
  Bottom Layer w15: v1(2080,2335) v1(2080,3315) ; v1(4370,2330) 4370,2310 v1(4370,2130) 4370,2095 4385,2080 R40.1@4450,2080
ENCODER2: R46.1 U4.35 U14.3 | length 3781.7
  Top Layer w15: v1(2292.5,3342.5) 2292.5,3337.5 2305,3325 2910,3325 2922.8,3337.8 U4.35 ; v1(2295,2380) v1(3685,2380) ; v1@3945,2130 3955,2140 U14.3
  Bottom Layer w15: v1(2292.5,3342.5) 2292.5,2357.5 v1(2295,2380) ; v1(3685,2380) 3685,2165 3720,2130 v1(3930,2130) 3930,2095 3945,2080 R46.1@4010,2080
ENCODER3: R52.1 U4.15 U17.3 | length 2563.7
  Top Layer w15: U4.15 3111.77,3971.77 3135,3995 3480,3995 3500,3975 v1(3500,3930) ; v1@3505,2130 3515,2140 U17.3
  Bottom Layer w15: v1(3500,3930) 3500,2140 v1(3490,2130) 3490,2095 3505,2080 R52.1@3570,2080
ERRO: R18.1 U4.3 | length 1620.3
  Top Layer w15: U4.3 3652.99,3537.99 v1(3690,3575) ; v1(3690,4145) R18.1
  Bottom Layer w15: v1(3690,3575) v1(3690,4145)
GND: C1.2 C2.1 C3.1 C4.2 C5.1 C6.1 C7.2 C8.2 C9.2 C10.2 C11.2 C12.2 C13.2 C14.2 C15.2 C16.2 C17.2 C18.2 CN1.1 CN2.1 CN3.3 CN4.3 CN5.2 CN6.1 CN6.2 CN7.3 CN8.3 CN9.3 CN10.3 CN11.3 CN12.3 CN13.3 CN14.3 CN15.3 CN16.3 CN17.3 CN18.3 CN19.3 CN20.3 LD1.2 LD2.2 LD4.2 LD5.2 LD6.2 LD7.2 P1.1 P1.2 P2.8 R3.2 R8.1 R11.2 R16.1 R20.1 R22.1 R30.2 R32.2 R34.2 R36.2 R38.2 R40.2 R42.2 R44.2 R46.2 R48.2 R50.2 R52.2 R54.2 R56.2 U1.5 U2.5 U3.2 U3.3 U4.6 U4.29 U5.2 | length 15025.5
  Top Layer w15: U4.29 2894.02,3600.98 2925,3570 3075,3570 3105,3600 v1(3105,3635) U4.6@3282.48,3635
  Top Layer w20: LD4.2 CN4.3 R22.1@1375,3605 ; CN3.3 1375,4135 C10.2 R20.1 ; C11.2@1380,3500 R22.1@1380,3600 ; C14.2 C13.2 ; R3.2 4390,3070 4425,3105 LD1.2 U1.5@4425,3264.37 ; R11.2 4405,3625 ; v1(4340,3277.5) 4340,3270 4335,3265 U1.5 ; v1(4340,3832.5) 4340,3825 4335,3820 U2.5 ; 4425,3630 4425,3645 ; U2.5@4425,3819.37 4425,3645 ; U3.2 4610,4155 ; R8.1 4635,3605 ; R16.1 4635,4130 ; U3.3 4660,4155 ; CN2.1 5015,3660 4980,3625 4655,3625 ; 4405,3625 4425,3645 ; 4405,3625 4445,3625 ; 4425,3645 4445,3625 ; 4445,3625 4615,3625 ; 4610,4155 4635,4130 ; 4610,4155 4635,4155 ; 4615,3625 4635,3605 ; 4615,3625 4635,3625 ; 4635,3605 4635,3625 ; 4635,3605 4655,3625 ; 4635,3625 4655,3625 ; 4635,4130 4635,4155 ; 4635,4130 4660,4155 ; 4635,4155 4660,4155
  Top Layer w30: LD7.2 LD6.2 LD5.2 LD4.2
  Top Layer w50: C15.2 3752.17,2620 U5.2 4210,2620 4247.17,2657.17 C16.2
  Bottom Layer w20: CN4.3 1135,3605 1110,3630 1110,4105 1140,4135 CN3.3 ; CN5.2 2795,4060 2815,4040 C12.2 ; C8.2 v1(3105,3635) ; C9.2@3105,3730 v1(3105,3635) ; C7.2 v1(3105,3635)
  Bottom Layer w30: CN11.3@1605,4810 R38.2 R32.2 ; CN14.3 R44.2 R50.2 ; R32.2@2045,4682.5 R32.2 ; CN8.3@2045,4807.5 R32.2 ; CN17.3@2250,1837.5 R50.2 ; R50.2@2250,1962.5 R50.2 ; R54.2@2485,4682.5 R54.2 ; CN19.3@2485,4807.5 R54.2 ; CN20.3@2690,1837.5 R56.2 ; R56.2@2690,1962.5 R56.2 ; R48.2@2926.25,4682.5 R48.2@2926.25,4685 ; CN16.3@2926.25,4807.5 R48.2@2926.25,4685 ; CN9.3@3131.25,1837.5 R34.2@3131.25,1960 ; R34.2@3131.25,1962.5 R34.2@3131.25,1960 ; R42.2@3362.5,4685 R48.2@2926.25,4685 ; R42.2@3365,4682.5 R42.2 ; CN13.3@3365,4807.5 R42.2 ; R52.2@3567.5,1960 R34.2@3131.25,1960 ; CN18.3@3570,1837.5 R52.2 ; R52.2@3570,1962.5 R52.2 ; R36.2@3805,4682.5 R36.2 ; CN10.3@3805,4807.5 R36.2 ; CN15.3@4010,1837.5 R46.2 ; R46.2@4010,1962.5 R46.2 ; CN7.3@4245,4810 R30.2 R36.2 ; CN12.3 R40.2 R46.2 ; R32.2 R54.2 ; R50.2 R56.2 ; R54.2 R48.2 R48.2@2926.25,4685 ; R56.2 R34.2 R34.2@3131.25,1960 ; R42.2 R36.2 ; R52.2 R46.2
  Bottom Layer w40: CN1.1 C3.1 C2.1 ; CN2.1 C6.1 C5.1
  Bottom Layer w80: U5.2 C18.2 4485,2620 4575,2530 4940,2530 ; CN6.1 4940,2515 4940,2530 ; 5015,2530 4940,2530 ; CN6.2 4940,2530
  Bottom Layer w100: CN6.1 5015,2530 CN6.2
  other v1: 1950,1600 2375,1615 2800,1615 3210,1615 3705,1615 4115,1615 4595,1615 1405,1665 4870,1670 1355,1950 4910,1960 5240,2045 1090,2070 5065,2090 1080,2245 5325,2275 1315,2280 2860,2485 4820,2495 4600,2500 2680,2515 3280,2520 5225,2520 4440,2530 985,2535 4705,2555 1410,2590 4350,2620 4540,2630 3185,2670 3650,2710 3570,2795 2620,2905 2800,2915 4310,2915 3045,2920 4415,2925 5320,2925 4560,2930 3905,3045 3370,3060 3615,3060 3910,3345 1125,3350 1490,3355 3675,3355 960,3420 3130,3495 3185,3565 4695,3600 5335,3615 2080,3690 2035,3780 1555,3810 1400,3870 5325,3875 1560,3930 945,3980 2270,4110 3300,4155 3535,4165 2815,4180 1800,4200 2045,4200 2285,4205 2215,4265 3650,4265 5300,4325 1445,4355 4840,4445 950,4475 5120,4515 5300,4535 1330,4615 1065,4635 4965,4645 1370,4850 4860,5000 4770,5030 3225,5055 3685,5055 4145,5055 4550,5055 2370,5060 1415,5065 1920,5065 2805,5065
IO1: P2.2 U4.25 | length 884.6
  Top Layer w15: v1(2620,3720) 2626.97,3726.97 U4.25
  Bottom Layer w15: P2.2 2620,3045 v1(2620,3720)
IO2: P2.3 U4.26 | length 847
  Top Layer w15: v1(2670,3675) 2690.47,3695.47 U4.26
  Bottom Layer w15: v1(2670,3675) 2670,3682.5 2660,3672.5 2660,3110 2670,3100 2697.57,3100 2710,3087.57 P2.3
IO3: P2.4 U4.27 | length 772.3
  Top Layer w15: v1(2715,3625) 2753.98,3663.98 U4.27
  Bottom Layer w15: v1(2715,3625) 2715,3125 2750,3090 2800,3090 2810,3080 P2.4
IO4: P2.5 U4.32 | length 665.1
  Top Layer w15: v1(2770,3385) 2770,3415 2745,3440 2745,3490 2761.5,3506.5 U4.32
  Bottom Layer w15: v1(2770,3385) 2770,3130 2780,3120 2895,3120 2910,3105 P2.5
IO5: P2.6 U4.37 | length 518.8
  Top Layer w15: U4.37 2985.79,3465.79 v1(2990,3470)
  Bottom Layer w15: v1(2990,3470) 2990,3055 P2.6
IO6: P2.7 U4.42 | length 375
  Top Layer w15: P2.7 3143.27,3068.27 U4.42
LED_AB: R25.1 U4.39 | length 1751.1
  Top Layer w15: R25.1 3025,3195 3048.78,3218.78 U4.39
LED_OK: R26.1 U4.40 | length 1885.7
  Top Layer w15: R26.1 1565,3050 1590,3075 1590,3115 1630,3155 3050,3155 3080.28,3185.28 U4.40
NetC2_2: C2.2 CN1.3 R6.2 R7.2 R8.2 | length 660.4
  Top Layer w40: R8.2 R7.2 R6.2 CN1.3
  Bottom Layer w40: CN1.3 5185,3390 5210,3365 C2.2
NetC3_2: C3.2 CN1.2 R4.1 R5.2 R6.1 | length 490
  Top Layer w40: R4.1 R5.2 R6.1 CN1.2
  Bottom Layer w40: CN1.2 C3.2
NetC5_2: C5.2 CN2.3 R14.2 R15.2 R16.2 | length 660.4
  Top Layer w40: R16.2 R15.2 R14.2 CN2.3
  Bottom Layer w40: CN2.3 5185,3945 5210,3920 C5.2
NetC6_2: C6.2 CN2.2 R12.1 R13.2 R14.1 | length 490
  Top Layer w40: R12.1@4735,3740 R13.2 R14.1 CN2.2
  Bottom Layer w40: CN2.2 C6.2
NetC12_1: C12.1 R23.2 R24.1 | length 200
  Bottom Layer w20: R23.2 C12.1 R24.1
NetC13_1: C13.1 U4.30 Y1.1 | length 525.2
  Top Layer w15: C13.1 Y1.1 2515,3600 2545.51,3569.49 U4.30
NetC14_1: C14.1 U4.31 Y1.2 | length 501.2
  Top Layer w15: C14.1 Y1.2 2515,3505 2547.99,3537.99 U4.31
NetCN2_4: CN2.4 R17.1 | length 210
  Top Layer w20: CN2.4 R17.1
NetCN3_2: CN3.2 R19.2 | length 205
  Top Layer w20: CN3.2 R19.2
NetCN4_2: CN4.2 R21.2 | length 205
  Top Layer w20: CN4.2 R21.2
NetCN7_2: CN7.2 LD8.2 | length 324.5
  Top Layer w15: LD8.2 4210,4710 4225,4725 4325,4725 4345,4745 CN7.2
NetCN8_2: CN8.2 LD9.2 | length 324.5
  Top Layer w15: LD9.2 2010,4710 2025,4725 2125,4725 2145,4745 CN8.2
NetCN9_2: CN9.2 LD10.2 | length 324.5
  Top Layer w15: CN9.2 3030,1920 3050,1940 3150,1940 3165,1955 LD10.2
NetCN10_2: CN10.2 LD11.2 | length 324.5
  Top Layer w15: LD11.2 3770,4710 3785,4725 3885,4725 3905,4745 CN10.2
NetCN11_2: CN11.2 LD12.2 | length 324.5
  Top Layer w15: LD12.2 1570,4710 1585,4725 1685,4725 1705,4745 CN11.2
NetCN12_2: CN12.2 LD13.2 | length 324.5
  Top Layer w15: CN12.2 4350,1920 4370,1940 4470,1940 4485,1955 LD13.2
NetCN13_2: CN13.2 LD14.2 | length 324.5
  Top Layer w15: LD14.2 3330,4710 3345,4725 3445,4725 3465,4745 CN13.2
NetCN14_2: CN14.2 LD15.2 | length 324.5
  Top Layer w15: CN14.2 1710,1920 1730,1940 1830,1940 1845,1955 LD15.2
NetCN15_2: CN15.2 LD16.2 | length 324.5
  Top Layer w15: CN15.2 3910,1920 3930,1940 4030,1940 4045,1955 LD16.2
NetCN16_2: CN16.2 LD17.2 | length 324.5
  Top Layer w15: LD17.2 2890,4710 2905,4725 3005,4725 3025,4745 CN16.2
NetCN17_2: CN17.2 LD18.2 | length 324.5
  Top Layer w15: CN17.2 2150,1920 2170,1940 2270,1940 2285,1955 LD18.2
NetCN18_2: CN18.2 LD19.2 | length 324.5
  Top Layer w15: CN18.2 3470,1920 3490,1940 3590,1940 3605,1955 LD19.2
NetCN19_2: CN19.2 LD20.2 | length 324.5
  Top Layer w15: LD20.2 2450,4710 2465,4725 2565,4725 2585,4745 CN19.2
NetCN20_2: CN20.2 LD21.2 | length 324.5
  Top Layer w15: CN20.2 2590,1920 2610,1940 2710,1940 2725,1955 LD21.2
NetD1_1: D1.1 R27.1 | length 205
  Bottom Layer w100: R27.1 D1.1
NetD1_2: D1.2 PTC1.2 | length 125
  Bottom Layer w100: D1.2 PTC1.2
NetLED1_1: LD1.1 R1.2 | length 125
  Top Layer w20: R1.2 LD1.1
NetLED2_1: LD2.1 R9.2 | length 250
  Top Layer w20: R9.2@4200,3715 LD2.1 R9.2@4200,3715
NetLED3_1: LD3.1 R18.2 | length 195.4
  Top Layer w20: LD3.1 4320,4210 4330,4200 4405,4200 4420,4185 R18.2
NetLED3_2: LD3.2 U3.1 | length 140
  Top Layer w20: LD3.2 U3.1
NetLED4_1: LD4.1 R25.2 | length 110
  Top Layer w30: LD4.1 R25.2
NetLED5_1: LD5.1 R26.2 | length 110
  Top Layer w30: LD5.1@1270,3050 R26.2@1380,3050
NetLED6_1: LD6.1 R28.2 | length 110
  Top Layer w30: LD6.1@1270,2905 R28.2
NetLED7_1: LD7.1 R29.2 | length 110
  Top Layer w30: LD7.1@1270,2765 R29.2
NetLED8_1: LD8.1 R31.1 | length 100
  Top Layer w15: LD8.1 R31.1
NetLED9_1: LD9.1 R33.1 | length 100
  Top Layer w15: LD9.1 R33.1
NetLED10_1: LD10.1 R35.1 | length 100
  Top Layer w15: R35.1 LD10.1
NetLED11_1: LD11.1 R37.1 | length 100
  Top Layer w15: LD11.1 R37.1
NetLED12_1: LD12.1 R39.1 | length 100
  Top Layer w15: LD12.1 R39.1@1770,4620
NetLED13_1: LD13.1 R41.1 | length 100
  Top Layer w15: R41.1 LD13.1
NetLED14_1: LD14.1 R43.1 | length 100
  Top Layer w15: LD14.1 R43.1
NetLED15_1: LD15.1 R45.1 | length 100
  Top Layer w15: R45.1 LD15.1
NetLED16_1: LD16.1 R47.1 | length 100
  Top Layer w15: R47.1@3845,2045 LD16.1
NetLED17_1: LD17.1 R49.1 | length 100
  Top Layer w15: LD17.1 R49.1
NetLED18_1: LD18.1 R51.1 | length 100
  Top Layer w15: R51.1 LD18.1
NetLED19_1: LD19.1 R53.1 | length 100
  Top Layer w15: R53.1@3405,2045 LD19.1
NetLED20_1: LD20.1 R55.1 | length 100
  Top Layer w15: LD20.1 R55.1
NetLED21_1: LD21.1 R57.1 | length 100
  Top Layer w15: R57.1 LD21.1
NetR5_1: R5.1 U1.6 | length 219.7
  Top Layer w20: U1.6 4535,3315 4560,3290 R5.1
NetR7_1: R7.1 U1.7 | length 219.7
  Top Layer w20: U1.7 4530,3365 4555,3390 R7.1
NetR13_1: R13.1 U2.6 | length 219.7
  Top Layer w20: U2.6 4535,3870 4560,3845 R13.1
NetR15_1: R15.1 U2.7 | length 219.7
  Top Layer w20: U2.7 4530,3920 4555,3945 R15.1
NetR17_2: R17.2 U3.4 | length 105
  Top Layer w20: U3.4 R17.2
NetR31_2: R31.2 U6.2 | length 107.4
  Top Layer w15: U6.2 4510,4555 R31.2
NetR33_2: R33.2 U7.2 | length 107.4
  Top Layer w15: U7.2 2310,4555 R33.2
NetR35_2: R35.2 U8.2 | length 107.4
  Top Layer w15: R35.2 2865,2110 U8.2
NetR37_2: R37.2 U9.2 | length 107.4
  Top Layer w15: U9.2 4070,4555 R37.2
NetR39_2: R39.2 U10.2 | length 172.4
  Top Layer w15: U10.2 1870,4555 ; 1870,4555 1870,4620 1870,4555
NetR41_2: R41.2 U11.2 | length 107.4
  Top Layer w15: R41.2 4185,2110 U11.2
NetR43_2: R43.2 U12.2 | length 107.4
  Top Layer w15: U12.2 3630,4555 R43.2
NetR45_2: R45.2 U13.2 | length 107.4
  Top Layer w15: R45.2 1545,2110 U13.2
NetR47_2: R47.2 U14.2 | length 172.4
  Top Layer w15: U14.2 3745,2110 ; 3745,2110 3745,2045 3745,2110
NetR49_2: R49.2 U15.2 | length 107.4
  Top Layer w15: U15.2 3190,4555 R49.2
NetR51_2: R51.2 U16.2 | length 107.4
  Top Layer w15: R51.2 1985,2110 U16.2
NetR53_2: R53.2 U17.2 | length 172.4
  Top Layer w15: U17.2 3305,2110 ; 3305,2110 3305,2045 3305,2110
NetR55_2: R55.2 U18.2 | length 107.4
  Top Layer w15: U18.2 2750,4555 R55.2
NetR57_2: R57.2 U19.2 | length 107.4
  Top Layer w15: R57.2 2425,2110 U19.2
PGC: CN5.5 U4.16 | length 205.5
  Top Layer w15: U4.16@3080,3868.98 3080,3985 3115,4020 CN5.5
PGD: CN5.4 U4.17 | length 205.3
  Top Layer w15: CN5.4 3015,4020 3048.78,3986.22 U4.17
RX1: R2.1 U1.1 U4.1 | length 1018.3
  Top Layer w15: U4.1 4140,3475 4160,3495 R2.1
  Top Layer w20: U1.1 R2.1
RX2: R10.1 U2.1 U4.5 | length 1362
  Top Layer w15: U4.5 3540.98,3600.98 v1(3570,3630) ; v1(3570,3970) U2.1
  Top Layer w20: U2.1 R10.1
  Bottom Layer w15: v1(3570,3630) v1(3570,3970)
S1: R30.1 U4.8 U6.3 | length 2104.9
  Top Layer w15: U4.8 v1@3954.53,3695.47 ; v1(3955,4330) v1(4325,4330) ; U6.3 4300,4525 4310,4535 v1(4325,4535)
  Bottom Layer w15: v1(3955,3695) v1(3955,4330) ; R30.1 4310,4585 4325,4570 v1(4325,4535) v1@4325,4325
S2: R36.1 U4.9 U9.3 | length 1591.1
  Top Layer w15: U4.9 3846.97,3726.97 v1(3875,3755) ; U9.3 3860,4525 v1@3870,4535
  Bottom Layer w15: R36.1 3870,4585 3885,4570 v1(3885,4535) 3885,4325 3885,3765 v1(3875,3755)
S3: R42.1 U4.10 U12.3 | length 1139.3
  Top Layer w15: U4.10 3433.47,3758.47 3450,3775 v1(3450,3795) ; U12.3 3420,4525 v1@3430,4535
  Bottom Layer w15: R42.1 3430,4585 3445,4570 v1(3445,4535) 3450,4530 v1(3450,3795)
S4: R48.1 U4.11 U15.3 | length 1398.7
  Top Layer w15: U15.3 2980,4525 v1@2990,4535 ; v1(3005,4325) v1(3375,4325) ; U4.11 3354.96,3789.96 v1(3375,3810)
  Bottom Layer w15: R48.1 2990,4585 3005,4570 v1(3005,4535) v1(3005,4325) ; v1(3375,3810) v1(3375,4325)
S5: R54.1 U4.14 U18.3 | length 1593.6
  Top Layer w15: U18.3 2540,4525 v1@2550,4535 ; v1(2565,4275) v1(3220,4275) ; U4.14 3143.27,3928.27 3160,3945 v1(3220,3945)
  Bottom Layer w15: R54.1 2550,4585 2565,4570 v1(2565,4535) 2565,4325 v1(2565,4275) ; v1(3220,3945) v1(3220,4275)
S6: R32.1 U4.19 U7.3 | length 1711.5
  Top Layer w15: U7.3 2100,4525 v1@2110,4535 ; v1@2125,3995 2950,3995 2985.79,3959.21 U4.19
  Bottom Layer w15: R32.1 2110,4585 2125,4570 v1(2125,4535) v1@2125,3995
  other v1: 2125,4010
S7: R38.1 U4.20 U10.3 | length 2126.7
  Top Layer w15: U10.3 1660,4525 v1@1670,4535 ; v1(1685,3960) 2930,3960 2954.29,3935.71 U4.20
  Bottom Layer w15: R38.1 1670,4585 1685,4570 v1(1685,4535) v1(1685,3960)
S8: R44.1 U4.21 U13.3 | length 3256.1
  Top Layer w15: v1(1735,3910) 1735,3925 1740,3930 2910,3930 2922.8,3917.2 U4.21 ; v1@1745,2130 1755,2140 U13.3
  Bottom Layer w15: 1730,2490 1730,2500 ; v1(1735,3910) 1730,3905 1730,2500 ; R44.1@1810,2080 1745,2080 1730,2095 v1(1730,2130) 1730,2500
S9: R50.1 U4.22 U16.3 | length 2663.2
  Top Layer w15: v1(2170,3865) 2173.7,3868.7 U4.22 ; v1@2185,2130 2195,2140 U16.3
  Bottom Layer w15: v1(2170,3865) 2170,2465 v1(2170,2130) 2170,2095 2185,2080 R50.1@2250,2080
S10: R56.1 U4.23 U19.3 | length 2832.4
  Top Layer w15: v1(2245,2440) 2250,2435 v1(2610,2435) ; v1(2245.04,3799.96) 2255.08,3810 2792.52,3810 U4.23 ; v1@2625,2130 2635,2140 U19.3
  Bottom Layer w15: v1(2245,2440) 2245,3790 v1(2245.04,3799.96) ; 2610,2390 2610,2405 ; v1(2610,2435) 2610,2405 ; R56.1@2690,2080 2625,2080 2610,2095 v1(2610,2130) 2610,2405
S11: R34.1 U4.24 U8.3 | length 3025.1
  Top Layer w15: v1(2340,2575) v1(3050,2575) ; v1(2340,3740) 2340,3756.97 2353.03,3770 2763.48,3770 2775.02,3758.47 U4.24 ; v1@3065,2130 3075,2140 U8.3
  Bottom Layer w15: v1(2340,2575) v1(2340,3740) ; v1(3050,2575) 3050,2425 v1(3050,2130) 3050,2095 3065,2080 R34.1@3130,2080
TX1: U1.4 U4.44 | length 1132
  Top Layer w15: U4.44 3206.26,3278.74 3220,3265 U1.4
TX2: U2.4 U4.4 | length 1162.6
  Top Layer w15: U4.4 3599.49,3569.49 v1(3625,3595) ; v1(3630,3820) U2.4
  Bottom Layer w15: v1@3630,3600 v1(3630,3820)
  Bottom Layer w20: v1(3625,3595) v1@3630,3600
TX/#RX1: R1.1 R3.1 U1.2 U1.3 U4.43 | length 1831.1
  Top Layer w15: U4.43 3174.76,3230.24 3185,3220 4075,3220 ; R1.1 4100,3195 ; U1.3 4270,3315 4290,3295 4290,3240 4270,3220 4125,3220 ; 4075,3220 4100,3195 ; 4075,3220 4100,3220 ; 4100,3195 4125,3220 ; 4100,3195 4100,3220 ; 4100,3220 4125,3220
  Top Layer w20: R3.1 R1.1 ; U1.3 4155,3315 4145,3325 4145,3355 4155,3365 U1.2
TX/#RX2: R9.1 R11.1 U2.2 U2.3 U4.2 | length 1564.5
  Top Layer w15: U4.2@3285,3505.49 4065.49,3505.49 4100,3540 R11.1
  Top Layer w20: R11.1 4100,3750 4125,3775 4270,3775 4290,3795 4290,3850 4270,3870 U2.3 4155,3870 4145,3880 4145,3910 4155,3920 U2.2
pads on no net: CN6.4 U4.12 U4.13 U4.33 U4.34

## Polygon pours and split planes (outlines as drawn)
GND on Top Layer "Top Layer-No Net 1" (solid, remove dead copper, pour order 4): 860,5135 5400,5135 5400,1515 860,1515
GND on Bottom Layer "Top Layer-No Net 1" (solid, remove dead copper, pour order 3): 860,5140 5400,5140 5400,1510 860,1510

## Other copper
Top Layer:
  region net 12V: 4650,4575 4650,4410 4705,4410 4705,4575
  rectangle net 5V: 3930,2170 4095,2225
  region net 5V: 4258.75,4495 4093.75,4495 4093.75,4440 4258.75,4440
  region net 5V: 2493.75,4495 2328.75,4495 2328.75,4440 2493.75,4440
  rectangle net 12V: 3690,4345 3840,4395
  region net 12V: 2005,2325 1855,2325 1855,2275 2005,2275
  rectangle net 12V: 1855,4340 2005,4390
Bottom Layer:
  region net 12V: 4650,4575 4650,4410 4705,4410 4705,4575
  rectangle net 5V: 3930,2170 4095,2225
  region net 5V: 4258.75,4495 4093.75,4495 4093.75,4440 4258.75,4440
  region net 5V: 2493.75,4495 2328.75,4495 2328.75,4440 2493.75,4440
  rectangle net 12V: 3690,4345 3840,4395
  region net 12V: 2005,2325 1855,2325 1855,2275 2005,2275
  rectangle net 12V: 1855,4340 2005,4390

## Silkscreen, mask and mechanical layers (free items; w line width, h text height)
Top Overlay:
  drawing of 168 lines, arcs and shapes, not listed
  text "S7" at 1655,5045 h100
  text "S6" at 2095,5045 h100
  text "S5" at 2535,5045 h100
  text "S4" at 2975,5045 h100
  text "S3" at 3415,5045 h100
  text "S2" at 3855,5045 h100
  text "S1" at 4295,5045 h100
  text "-" at 1625,5015 h60 r180
  text "S" at 1725,5015 h60 r180
  text "+" at 1825,5015 h60 r180
  text "-" at 2065,5015 h60 r180
  text "S" at 2165,5015 h60 r180
  text "+" at 2265,5015 h60 r180
  text "-" at 2505,5015 h60 r180
  text "S" at 2605,5015 h60 r180
  text "+" at 2705,5015 h60 r180
  text "-" at 2945,5015 h60 r180
  text "S" at 3045,5015 h60 r180
  text "+" at 3145,5015 h60 r180
  text "-" at 3385,5015 h60 r180
  text "S" at 3485,5015 h60 r180
  text "+" at 3585,5015 h60 r180
  text "-" at 3825,5015 h60 r180
  text "S" at 3925,5015 h60 r180
  text "+" at 4025,5015 h60 r180
  text "-" at 4265,5015 h60 r180
  text "S" at 4365,5015 h60 r180
  text "+" at 4465,5015 h60 r180
  text "AN1" at 1100,4420 h100
  text "5V" at 945,4305 h60
  text "ERR" at 4040,4225 h100
  text "AN" at 945,4205 h60
  text "485 EXT." at 4910,4120 h100
  text "GND" at 885,4090 h60
  text "ERR" at 5160,4020 h60
  text "B" at 5160,3920 h60
  text "AN2" at 1095,3895 h100
  text "A" at 5160,3815 h60
  text "5V" at 945,3775 h60
  text "GND" at 5160,3700 h60
  text "AN" at 945,3675 h60
  text "TX/RX" at 4300,3570 h100
  text "485 CPU" at 4910,3565 h100
  text "GND" at 885,3560 h60
  text "12V" at 5170,3465 h60
  text "GND" at 1965,3410 h100
  text "B" at 5160,3365 h60
  text "A" at 5160,3260 h60
  text "Futurize" at 3198,3209 h194.44
  text "ST" at 945,3165 h100
  text "GND" at 5160,3145 h60
  text "MÁQUINAS DE BORDAR E LASER" at 3200,3139 h66
  text "OK" at 925,3025 h100
  text "TX/RX" at 4300,3010 h100
  text "5V" at 950,2870 h100
  text "pr406v1 - Sensores Plasma" at 2085,2760 h110
  text "12V" at 5190,2735 h60
  text "12V" at 905,2730 h100
  text "27/01/2016" at 2450,2635 h110
  text "GND" at 5180,2565 h60
  text "GND" at 5175,2400 h60
  text "FONTE" at 4955,2235 h100
  text "+" at 1590,1650 h60
  text "S" at 1690,1650 h60
  text "-" at 1790,1650 h60
  text "+" at 2030,1650 h60
  text "S" at 2130,1650 h60
  text "-" at 2230,1650 h60
  text "+" at 2470,1650 h60
  text "S" at 2570,1650 h60
  text "-" at 2670,1650 h60
  text "+" at 2910,1650 h60
  text "S" at 3010,1650 h60
  text "-" at 3110,1650 h60
  text "+" at 3350,1650 h60
  text "S" at 3450,1650 h60
  text "-" at 3550,1650 h60
  text "+" at 3790,1650 h60
  text "S" at 3890,1650 h60
  text "-" at 3990,1650 h60
  text "+" at 4230,1650 h60
  text "S" at 4330,1650 h60
  text "-" at 4430,1650 h60
  text "S8" at 1655,1555 h100
  text "S9" at 2095,1555 h100
  text "S10" at 2515,1555 h100
  text "S11" at 2960,1555 h100
  text "ENC3" at 3360,1555 h100
  text "ENC2" at 3800,1555 h100
  text "ENC1" at 4240,1555 h100

## Text inside footprints (layer, text, board x,y; h text height)
CN5: Top Overlay "1" at 2533,4039 h40; Top Overlay "GND" at 2733,4124 h35 r90; Top Overlay "VCC" at 2633,4124 h35 r90; Top Overlay "#MCLR" at 2932,4124 h35 r90; Top Overlay "PGD" at 3036,4124 h35 r90; Top Overlay "PGC" at 3138,4124 h35 r90